# Altium PCB MCU.PcbDoc
Units mm, origin at the board's own origin, x right, y up, seen from the top; angles counter-clockwise.
Board outline 47.6 x 56 mm, 2 copper layers (Top Layer, Bottom Layer); 17 components, 32 nets, 141 pads, 12 vias.
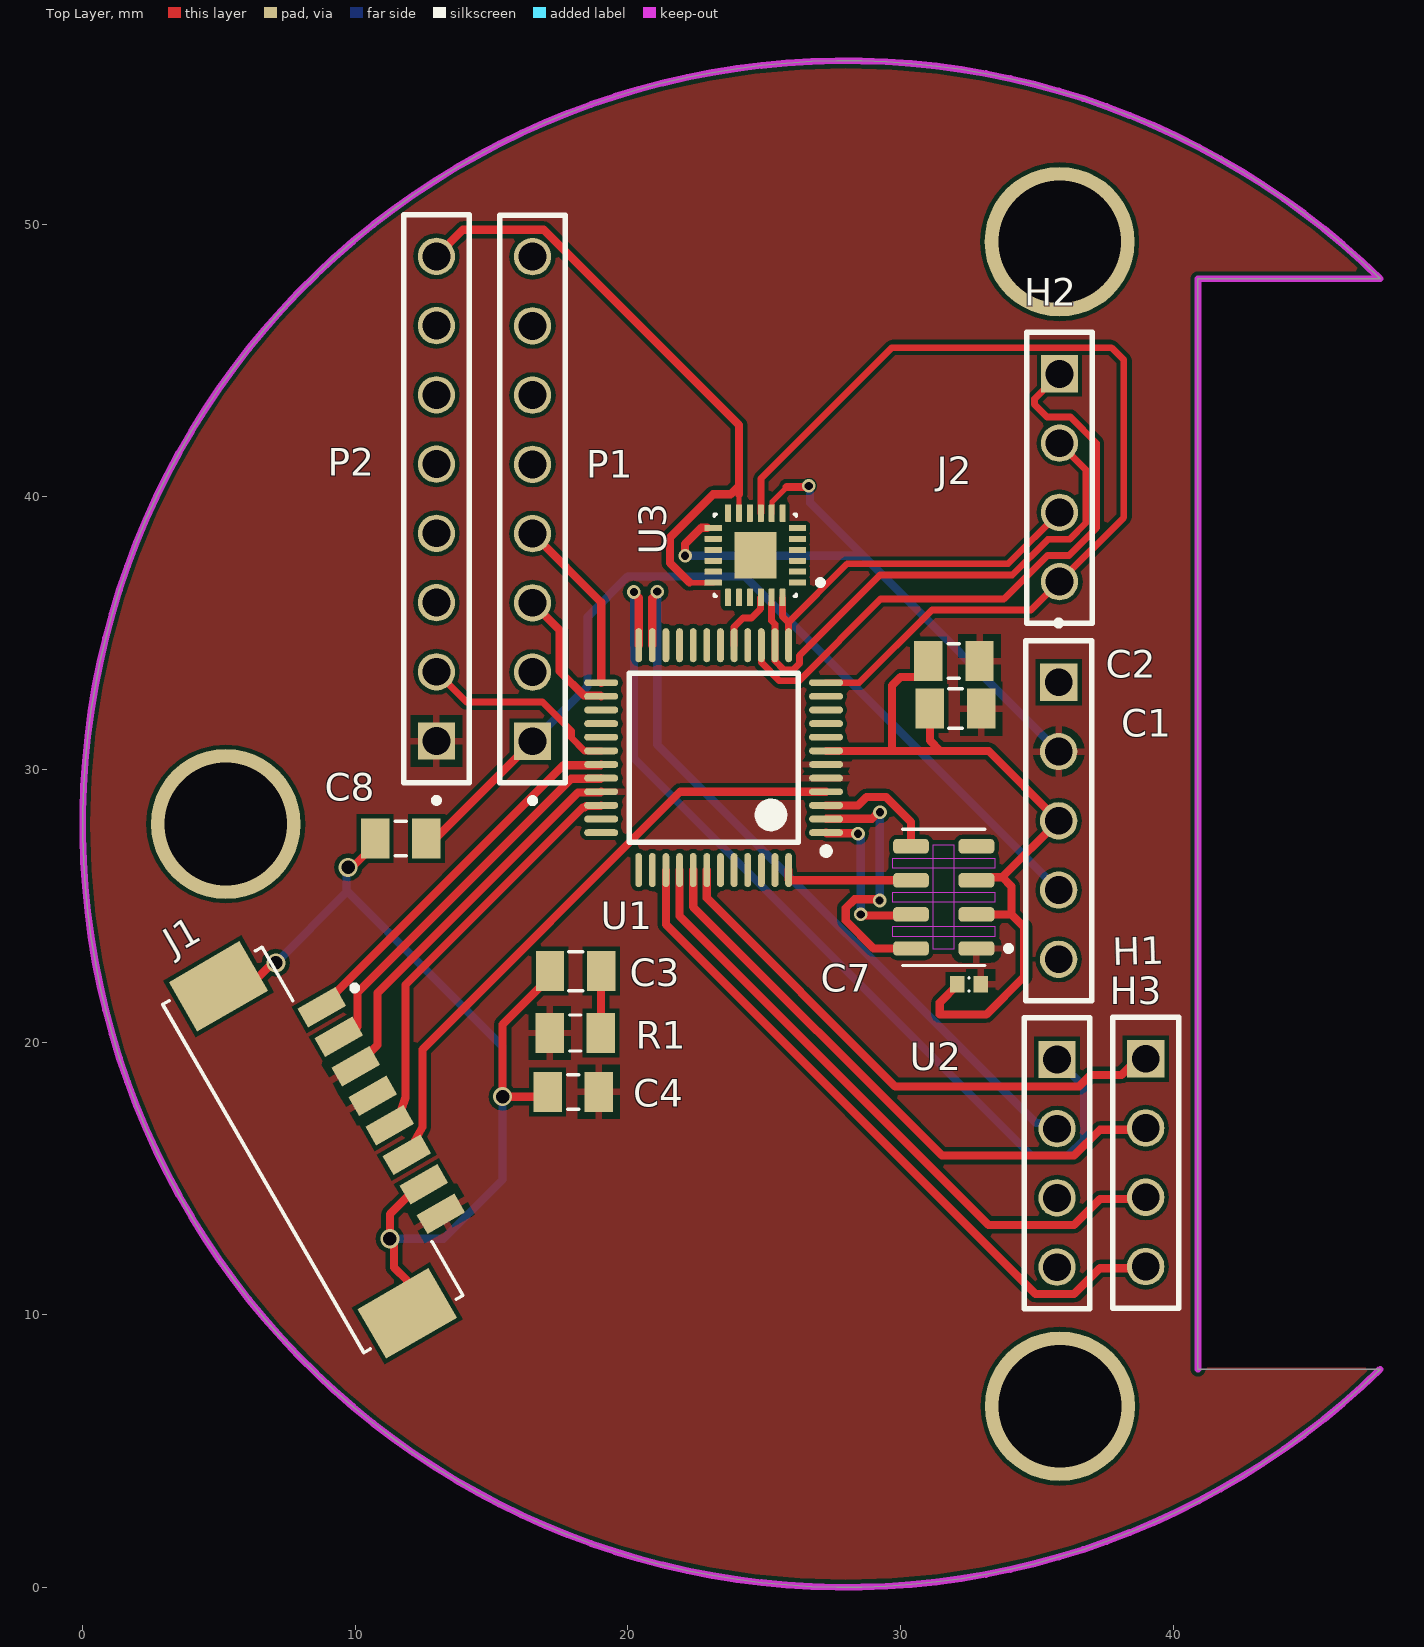
[diagram p0: Top Layer view]
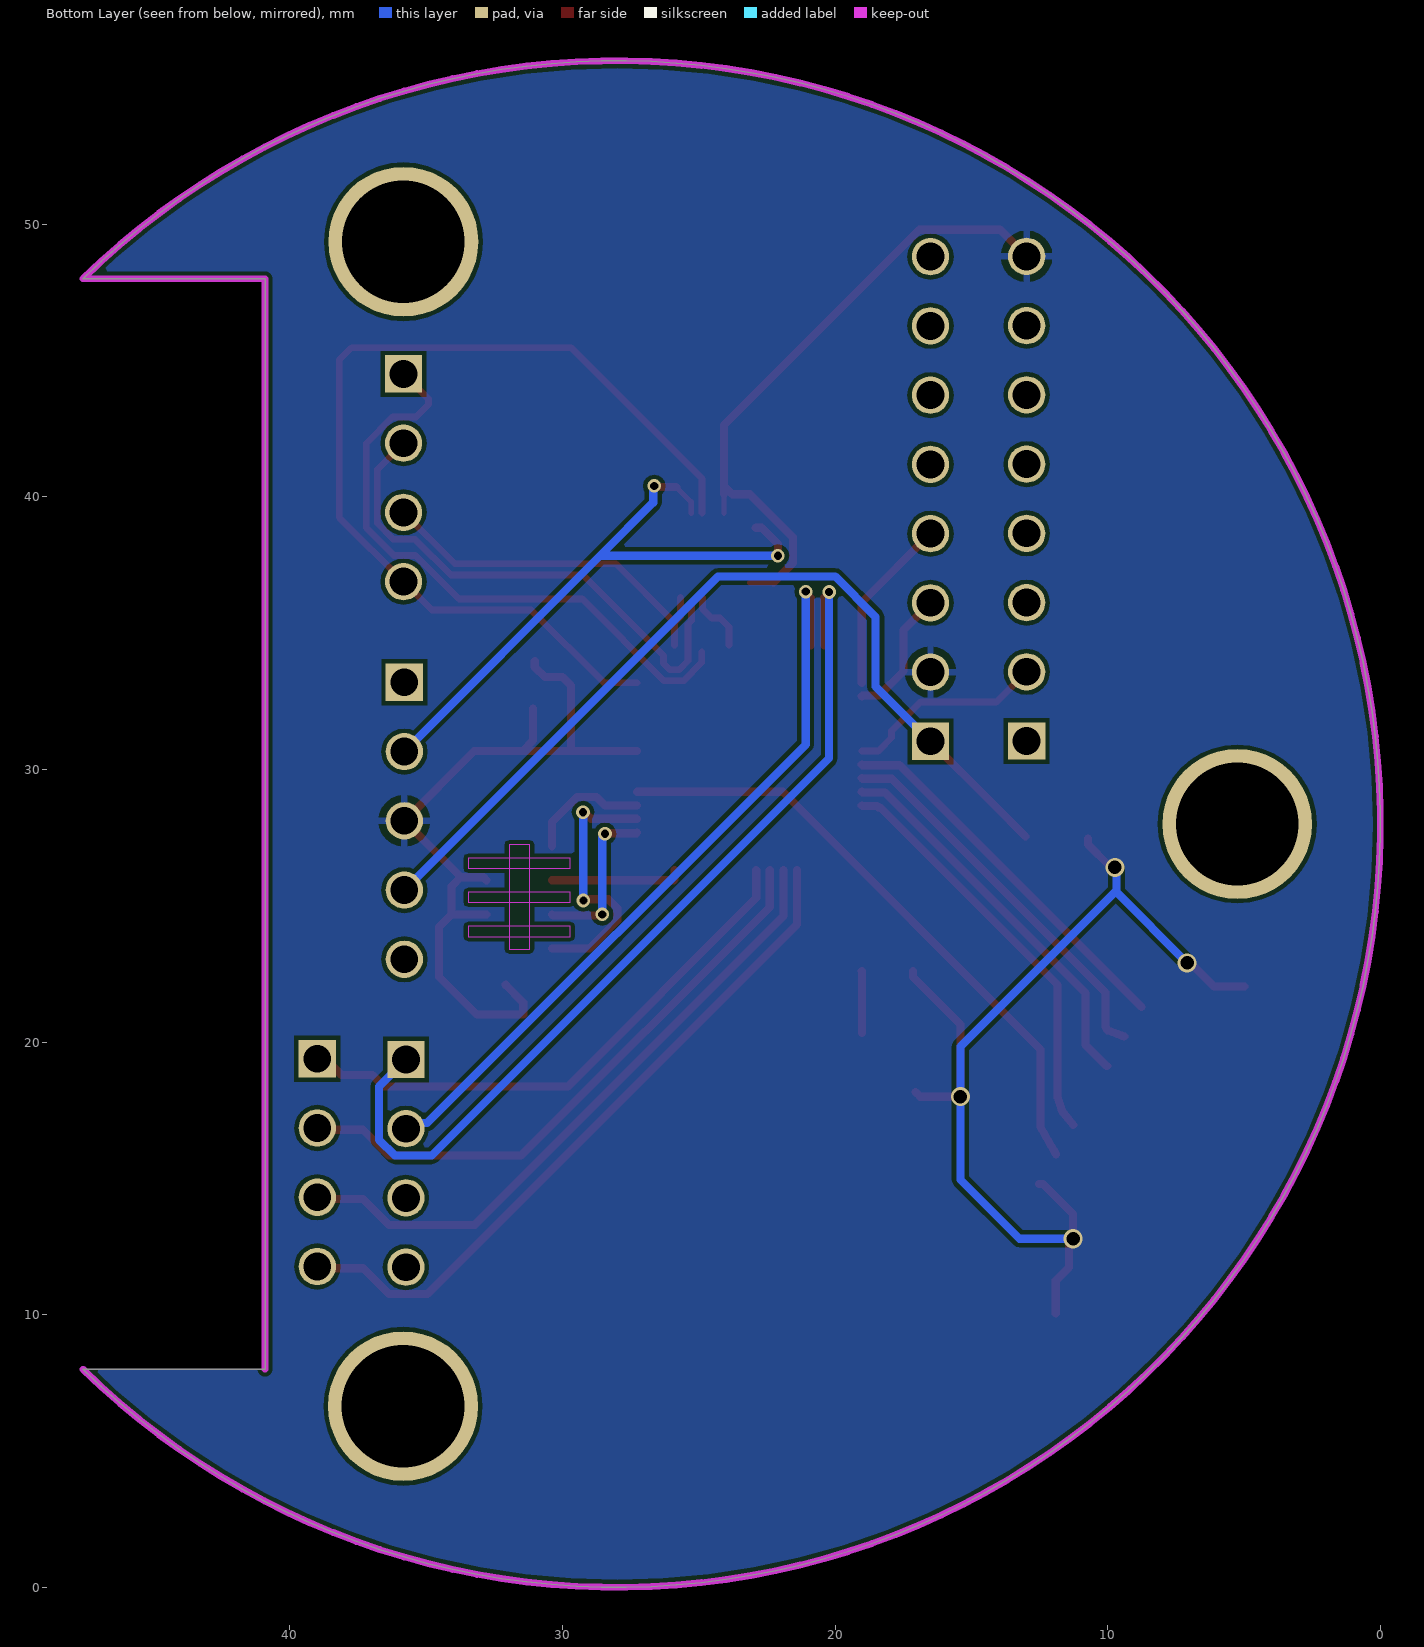
[diagram p1: Bottom Layer view, seen from below]
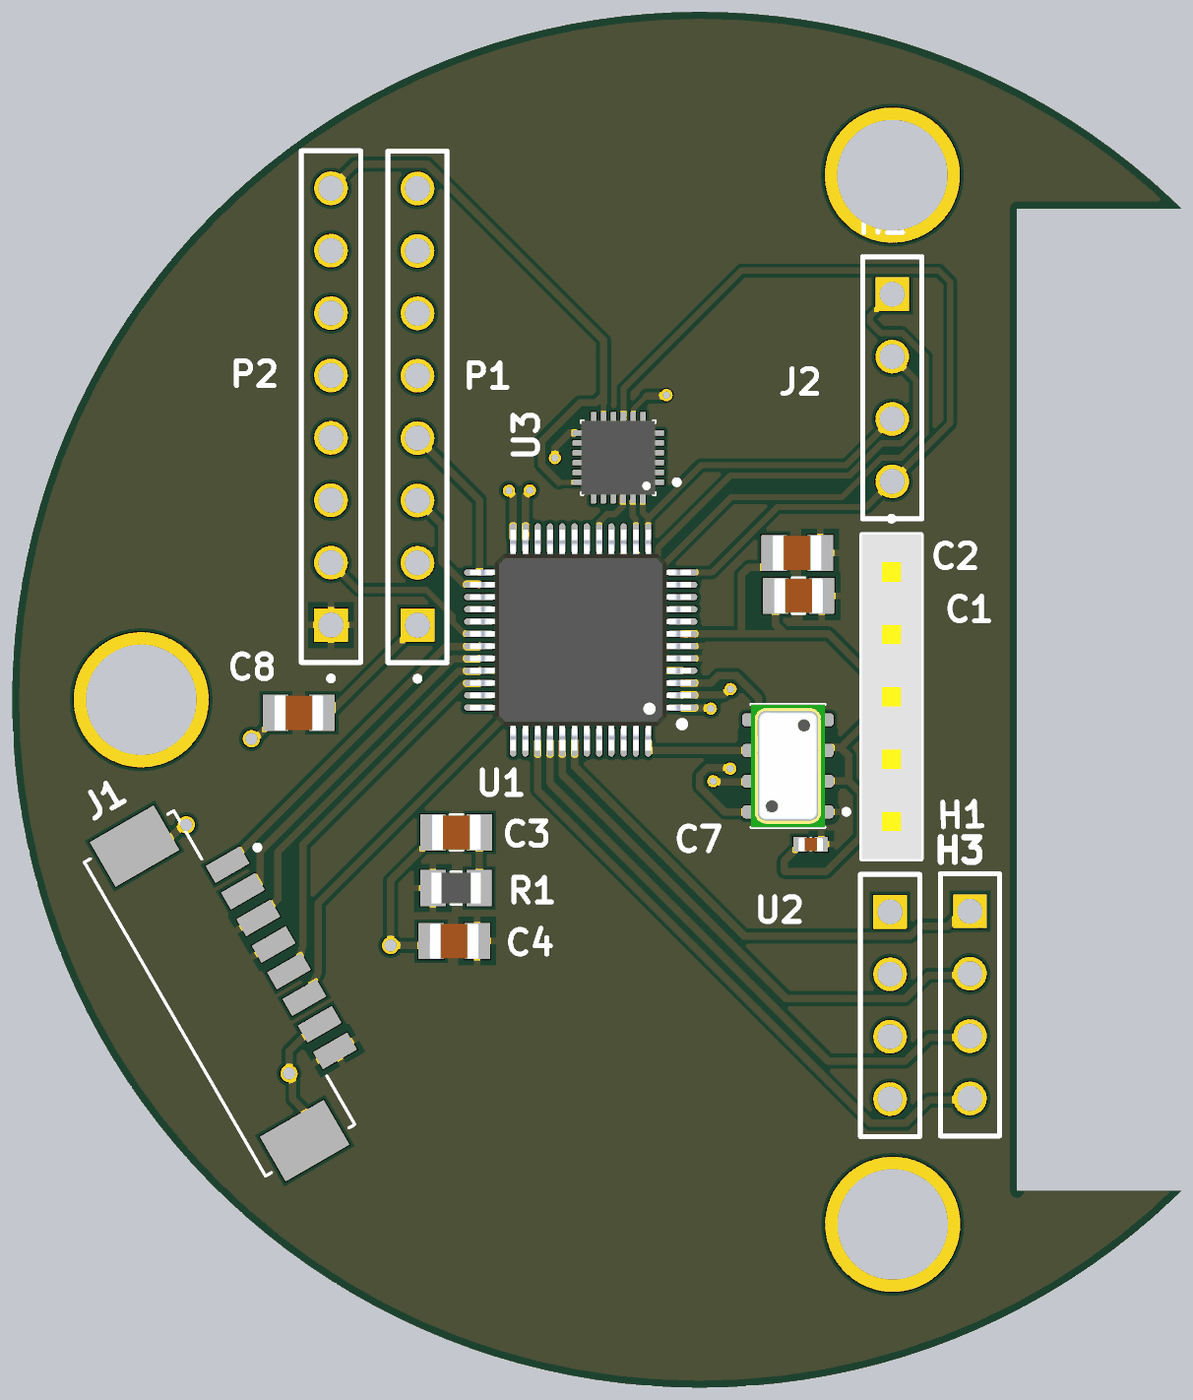
[diagram p2: 3D render of the assembled board from above, using the file's embedded part models]

## Layer stack, top to bottom
Top Solder: solder mask 0.0102, Solder Resist, Dk 3.5
Top Layer: signal copper 0.0356
Dielectric 1: dielectric 0.32, FR-4, Dk 4.8
Bottom Layer: signal copper 0.0356
Bottom Solder: solder mask 0.0102, Solder Resist, Dk 3.5

## Board outline
47.596,8 cw(c28,28) 47.596,48 47.6,48 40.913,48 40.913,8

## Design rules (kind name [scope] priority, off if disabled: settings)
Clearance [All] p1: gap=0.152 ignorepadtopadclearanceinfootprint=FALSE
HoleSize [All] p1: absolutevalues=TRUE maxlimit=6.2 minlimit=0.3 maxpercent=80.000 minpercent=20.000
MinimumAnnularRing [All] p1: minimumring=0.15
MinimumSolderMaskSliver [All] p1: minsoldermaskwidth=0.1
PolygonConnect ViaConnect [IsVia] p1: connectstyle=Direct reliefconductorwidth=0.254 reliefentries=4 polygonreliefangle="90 Angle" airgapwidth=0.254
PolygonConnect [All] p2: connectstyle=Relief reliefconductorwidth=0.254 reliefentries=4 polygonreliefangle="90 Angle" airgapwidth=0.254
RoutingVias [All] p1: holewidth=0.3 width=0.6 viastyle="Through Hole" minholewidth=0.3 minwidth=0.5 maxholewidth=1 maxwidth=5
SilkToSilkClearance [All] p1: silktosilkclearance=0.1
SilkToSolderMaskClearance [IsPad] p1: minsilkscreentomaskgap=0.1 clearancetoexposedcopper=TRUE
SolderMaskExpansion [All] p1: expansion=0.051 istentingtop=FALSE
SupplyNets "Schematic Supply Nets" [InNet('GND')] p1: voltage=0.000
SupplyNets "Schematic Supply Nets_5" [InNet('3V3')] p2: voltage=0.000
Width [All] p1: maxlimit=25.4 minlimit=0.15 preferedwidth=0.3
26 further rules are at their usual default settings.

## Components (designator, comment, footprint, x,y, rotation, side; value= is the part's Value field where it differs from the comment)
C1 "100nF" CAPACITOR_0805_2012M-70N 32.019,32.234 r0 top
C2 "22uF" CAPACITOR_0805_2012M-70N 31.961,33.977 r0 top
C3 "22uF" CAPACITOR_0805_2012M-70N 18.085,22.602 r0 top
C4 "22uF" CAPACITOR_0805_2012M-70N 17.997,18.174 r0 top
C7 "100nf" CAPACITOR_0402_1005M_55N 32.512,22.116 r0 top
C8 "22uF" CAPACITOR_0805_2012M-70N 11.667,27.466 r0 top
H1 "SSQ-104-02-S-S" *SAMTEC_SSQ-104-02-S-S_SSQ-104-02-S-S(Primary) 35.744,15.554 r270 top
H2 "SSQ-104-02-S-S" *SAMTEC_SSQ-104-02-S-S_SSQ-104-02-S-S(Primary) 35.833,40.7 r270 top
H3 "SSQ-104-02-S-S" *SAMTEC_SSQ-104-02-S-S_SSQ-104-02-S-S(Primary) 38.996,15.578 r270 top
J1 "0532610871" MOLEX_0532610871 8.444,16.046 r300 top
J2 "SSQ-105-03-S-S" SAMTEC_SSQ-105-03-S-S 35.803,28.118 r270 top
P1 "SSQ-108-01-F-S-LL" *SAMTEC_SSQ-108-01-F-S-LL_SSQ-108-01-F-S-LL(Primary) 16.502,39.923 r90 top
P2 "SSQ-108-01-F-S-LL" *SAMTEC_SSQ-108-01-F-S-LL_SSQ-108-01-F-S-LL(Primary) 12.978,39.932 r90 top
R1 "*" Resistor_0805_2012M-50N 18.071,20.334 r180 top
U1 "MSP430FR2355TPT" PT0048A_L 23.147,30.433 r180 top
U2 "MS5611-01BA03" SON125P500X300X100-8N 31.586,25.309 r180 top
U3 "" QFN40P300X300X95-25N 24.677,37.857 r180 top

## Footprints (in the part's own frame and the unit in brackets; to place one, negate y for a bottom-side part, rotate by r counter-clockwise, add the part's x,y. Pads: shape width x height; smd on the part's side, far side on the other; paste and mask are expansions set on the pad)
*SAMTEC_SSQ-104-02-S-S_SSQ-104-02-S-S(Primary) [mm]
  rect 1.37x1.37 hole 1.02: 01(-3.81,0)
  round 1.37 hole 1.02: 02(-1.27,0) 03(1.27,0) 04(3.81,0)
  silkscreen extent -5.34,-1.21 5.34,1.21
*SAMTEC_SSQ-108-01-F-S-LL_SSQ-108-01-F-S-LL(Primary) [mm]
  rect 1.37x1.37 hole 1.02: 01(-8.89,0)
  round 1.37 hole 1.02: 02(-6.35,0) 03(-3.81,0) 04(-1.27,0) 05(1.27,0) 06(3.81,0) 07(6.35,0) 08(8.89,0)
  silkscreen extent -11.16,-1.21 10.42,1.21
CAPACITOR_0402_1005M_55N [mm] "Capacitor, 0402 (1005 metric), 0.55mm height, nominal pads"
  rect 0.54x0.6 smd mask+0.051: 1(-0.432,0) 2(0.432,0)
  silkscreen extent 0,-0.25 0,0.25, body extent -0.5,-0.28 0.5,0.27, height 0.48
CAPACITOR_0805_2012M-70N [mm] "Capacitor, 0805 (2012 metric), 0.7mm high, nominal pads,"
  rect 1.04x1.47 smd mask+0.051: 1(-0.94,0) 2(0.94,0)
  silkscreen extent -0.25,-0.72 0.25,0.72, body extent -1,-0.73 1,0.73, height 1.23
MOLEX_0532610871 [mm]
  rect 0.8x1.6 smd: 1(-4.375,2.9) 2(-3.125,2.9) 3(-1.875,2.9) 4(-0.625,2.9) 5(0.625,2.9) 6(1.875,2.9) 7(3.125,2.9) 8(4.375,2.9)
  rect 2.1x3 smd: S1(-6.925,0) S2(6.925,0)
  silkscreen extent -7.37,-2.1 7.37,4.4
PT0048A_L [mm]
  oval 1.25x0.25 smd paste+0 mask+0.051: 1(-4.125,2.75) 2(-4.125,2.25) 3(-4.125,1.75) 4(-4.125,1.25) 5(-4.125,0.75) 6(-4.125,0.25) 7(-4.125,-0.25) 8(-4.125,-0.75) 9(-4.125,-1.25) 10(-4.125,-1.75) 11(-4.125,-2.25) 12(-4.125,-2.75) 25(4.125,-2.75) 26(4.125,-2.25) 27(4.125,-1.75) 28(4.125,-1.25) 29(4.125,-0.75) 30(4.125,-0.25) 31(4.125,0.25) 32(4.125,0.75) 33(4.125,1.25) 34(4.125,1.75) 35(4.125,2.25) 36(4.125,2.75)
  oval 0.25x1.25 smd paste+0 mask+0.051: 13(-2.75,-4.125) 14(-2.25,-4.125) 15(-1.75,-4.125) 16(-1.25,-4.125) 17(-0.75,-4.125) 18(-0.25,-4.125) 19(0.25,-4.125) 20(0.75,-4.125) 21(1.25,-4.125) 22(1.75,-4.125) 23(2.25,-4.125) 24(2.75,-4.125) 37(2.75,4.125) 38(2.25,4.125) 39(1.75,4.125) 40(1.25,4.125) 41(0.75,4.125) 42(0.25,4.125) 43(-0.25,4.125) 44(-0.75,4.125) 45(-1.25,4.125) 46(-1.75,4.125) 47(-2.25,4.125) 48(-2.75,4.125)
  silkscreen extent -4.25,-3.1 3.1,3.55, body extent -4.5,-4.5 4.5,4.5, height 1.6
QFN40P300X300X95-25N [mm]
  rrect25% 0.64x0.22 smd: 1(-1.545,1) 2(-1.545,0.6) 3(-1.545,0.2) 4(-1.545,-0.2) 5(-1.545,-0.6) 6(-1.545,-1) 13(1.545,-1) 14(1.545,-0.6) 15(1.545,-0.2) 16(1.545,0.2) 17(1.545,0.6) 18(1.545,1)
  rrect25% 0.22x0.64 smd: 7(-1,-1.545) 8(-0.6,-1.545) 9(-0.2,-1.545) 10(0.2,-1.545) 11(0.6,-1.545) 12(1,-1.545) 19(1,1.545) 20(0.6,1.545) 21(0.2,1.545) 22(-0.2,1.545) 23(-0.6,1.545) 24(-1,1.545)
  rect 1.54x1.7 smd paste-2: 25(0,0)
  silkscreen extent -2.48,-1.5 1.5,1.5, body extent -1.5,-1.5 1.5,1.5, height 0.95
Resistor_0805_2012M-50N [mm] "Resistor, 0805 (2012 metric), nominal pads"
  rect 1.04x1.47 smd mask+0.051: 1(-0.94,0) 2(0.94,0)
  silkscreen extent -0.2,-0.66 0.2,0.66, body extent -1,-0.63 1,0.62, height 0.5
SAMTEC_SSQ-105-03-S-S [mm]
  rect 1.37x1.37 / inner round 1.37 / far side rect 1.37x1.37 hole 1.02: 1(-5.08,0)
  round 1.37 hole 1.02: 2(-2.54,0) 3(0,0) 4(2.54,0) 5(5.08,0)
  silkscreen extent -7.35,-1.21 6.61,1.21, body extent -6.6,-1.21 6.6,1.21, height 8.51
SON125P500X300X100-8N [mm]
  rrect50% 1.31x0.53 smd: 1(-1.2,1.875) 2(-1.2,0.625) 3(-1.2,-0.625) 4(-1.2,-1.875) 5(1.2,-1.875) 6(1.2,-0.625) 7(1.2,0.625) 8(1.2,1.875)
  Keep-Out Layer region: 1.875,1.064 -1.878,1.064 -1.878,1.438 1.875,1.438
  Keep-Out Layer region: 1.875,-0.188 -1.878,-0.188 -1.878,0.188 1.875,0.188
  Keep-Out Layer region: 1.875,-1.44 -1.878,-1.44 -1.878,-1.062 1.875,-1.062
  Keep-Out Layer region: 0.381,-1.935 -0.375,-1.935 -0.375,1.905 0.381,1.905
  Keep-Out Layer region: 0.381,-1.935 -0.375,-1.935 -0.375,1.905 0.381,1.905
  Keep-Out Layer region: 1.875,1.063 -1.875,1.063 -1.875,1.438 1.875,1.438
  Keep-Out Layer region: 0.381,-1.935 -0.375,-1.935 -0.375,1.905 0.381,1.905
  Keep-Out Layer region: 1.875,-0.188 -1.878,-0.188 -1.878,0.188 1.875,0.188
  Keep-Out Layer region: 1.875,-1.44 -1.878,-1.44 -1.878,-1.062 1.875,-1.062
  silkscreen extent -2.48,-2.5 1.5,2.5, body extent -1.5,-2.5 1.5,2.5, height 1.1

## Part data
C1: library part "Generic Capacitor", "Generic Capacitor", Capacitance at Rated Voltage=40%, MF Part No.=C0805C104K5RAC7800, Package=0805, Rated Voltage=50V, Supplier 1 Part No.=399-C0805C104K5RAC7800CT-ND, Temp Range="-55°C ~ 125°C", Temperature Coefficient=X7R, Tolerance=±10%, Supplier 1=Digikey
C2 C3 C4 C8: library part C0805C226M9PACTU, "Passive - Capacitor, X5R, 22uF Max, 6.3V, 0805 (2012 Metric), ±20%, -55°C ~ 85°C. 8.8uF @ 5V", Capacitance at Rated Voltage=30%, Package=0805, Rated Voltage=6.3V, Supplier 1 Part No.=399-C0805C226M9PAC7800CT-ND, Temp Range="-55°C ~ 85°C", Temperature Coefficient=X5R, Tolerance=±20%, APSS Standard Part="APSS Standard", MF Part No.=C0805C226M9PACTU, Supplier 1=Digikey
C7: library part "GCM1555CxxxxxF Series", "Passive - Capacitor Series, C0G, 5pF ~ 1nF, 50V, 0402 (1005 Metric), ±1%, -55°C ~ 125°C", Capacitance at Rated Voltage=100%, Package=0402, Rated Voltage=50V, Temp Range="-55°C ~ 125°C", Temperature Coefficient=C0G, Tolerance=±1%, Value Range="5pF ~ 1nF", APSS Standard Part="APSS Standard", E Series=E24, Supplier 1=Digikey
J1: "Picoblade Connector, 8 Circuit Single Row, Right Angle Surface Mount SMT PCB", Package=None, Availability="In Stock", Check_prices=https://www.snapeda.com/parts/0532610871/Molex/view-part/?ref=eda, MF=Molex, MP=0532610871, Price=None, Purchase-URL=https://pricing.snapeda.com/search/part/0532610871/?ref=eda, SnapEDA_Link=https://www.snapeda.com/parts/0532610871/Molex/view-part/?ref=snap
J2: Package=None, Availability=Unavailable, MF="{'manufacturer': u'Samtec Inc.'}", MP=SSQ-105-03-S-S, Price=None
R1: library part "RMCF0805JT Series", "Passive - Resistor Series, 0805, 5%, 100m - 22M, E24, 0.063W, 1/16W, ±200ppm/°C, -55°C ~ 155°C, 0805 (2012 Metric)", Package=0805, Power=1/8W, Rated Voltage=150V, Temp Range="-55°C ~ 155°C", Temperature Coefficient=±200ppm/°C, Tolerance=5%, Value Range="100m ~ 22M", APSS Standard Part="APSS Standard", E Series=E24, Supplier 1=Digikey
U1: library part MSP430FR2355IPT, Package=LQFP-48, Rated Voltage="1.8V ~ 3.6V", Supplier 1 Part No.=296-50260-ND, Temp Range="-40°C ~ 105°C (TA)", APSS Standard Part="APSS Standard", MF Part No.=MSP430FR2355TPT, Supplier 1=Digikey
U2: "Pressure Sensor 0.15PSI ~ 17.4PSI (1kPa ~ 120kPa) Absolute - 24 b 8-SMD", Package="SMD-8 Measurement Specialties", Availability="Not in stock", Check_prices=https://www.snapeda.com/parts/MS5611-01BA03/TE+Connectivity+ALCOSWITCH+Switches/view-part/?ref=eda, MF="TE Connectivity", MP=MS5611-01BA03, Price=None, SnapEDA_Link=https://www.snapeda.com/parts/MS5611-01BA03/TE+Connectivity+ALCOSWITCH+Switches/view-part/?ref=snap
U3: library part MPU-6500, "MotionTracking Device Digital Output 1.8V 24-Pin QFN EP T/R", Package="QFN-24 TDK", Check_prices=https://www.snapeda.com/parts/MPU-6500/TDK/view-part/?ref=eda, MF="TDK InvenSense", MP=MPU-6500, SnapEDA_Link=https://www.snapeda.com/parts/MPU-6500/TDK/view-part/?ref=snap
P1 P2: Check_prices=https://www.snapeda.com/parts/SSQ-108-01-F-S-LL/Samtec/view-part/?ref=eda, SnapEDA_Link=https://www.snapeda.com/parts/SSQ-108-01-F-S-LL/Samtec/view-part/?ref=snap

## Free pads (board coordinates)
  round 5.5 hole 4.5: 1(5.25,28) 1(35.837,49.357) 1(35.851,6.643)

## Via types
v1: diameter 0.5, hole 0.3, Top Layer to Bottom Layer, 8 vias
v2: diameter 0.7, hole 0.5, Top Layer to Bottom Layer, 4 vias

## Nets (pads, with @x,y where several pads share a name; then routed paths per layer and width w, separated by ;. In a path a pad name is that pad's centre, name@x,y a point inside that pad or via, vN(x,y) a via of type N, cw(c..) or ccw(c..) an arc to the next point about the centre after c; other vN are vias at no path point)
1V8: J2.1
3V3: C1.2 C2.2 C4.2 C7.2 J1.3 J1.4 J1.8 J2.2 P2.01 R1.2 U1.5 U1.6 U1.33 U2.1 U3.8 U3.13 | length 37.9
  Top Layer w0.2: U3.8 25.287,39.412 25.287,39.819 25.831,40.363
  Top Layer w0.3: J1.3 10.049,19.12 10.821,19.892 10.821,21.808 18.171,29.158 18.997,29.158 U1.33 ; v1(22.1,37.843) 22.1,38.266 22.703,38.869 U3.13@22.912,38.869 ; 25.831,40.363 26.599,40.363 v1(26.637,40.402)
  Bottom Layer w0.3: v1(22.1,37.843) 28.618,37.843 ; v1(26.637,40.402) 26.675,40.363 26.675,39.786 28.618,37.843 ; J2.2 28.618,37.843
5V: C8.2 J2.4 P1.01 | length 33
  Top Layer w0.3: C8.2@13.016,27.547 14.201,28.732 P1.01
  Bottom Layer w0.3: P1.01 18.515,33.046 18.515,35.6 19.994,37.078 24.303,37.078 J2.4
BTCRL0: H1.03
BTCRL1: H1.04
Buzz_GPIO: H3.04 U1.39 | length 25.2
  Top Layer w0.3: U1.39 21.397,24.315 34.956,10.756 36.369,10.756 37.318,11.705 H3.04@38.641,11.705
ESP_GPIO16: P2.02 U1.30 | length 7.4
  Top Layer w0.25: P2.02 14.086,32.473 16.864,32.473 17.929,31.407 17.929,31.164 18.41,30.683 U1.30
GND: C1.1 C2.1 C3.1 C4.1 C7.1 C8.1 J1.7 J1.S1 J1.S2 J2.3 P1.02 P2.08 U1.7 U2.2 U2.3 U3.11 U3.18 | length 92.8
  Top Layer w0.2: 22.267,36.857 U3.18 ; U3.11 24.077,40.095
  Top Layer w0.3: J1.S1 6.108,22.043 6.896,22.831 7.011,22.831 v2(7.087,22.908) ; v2(9.738,26.411) 9.814,26.487 9.964,26.487 10.727,27.251 C8.1 ; J1.S2 11.907,11.252 11.424,11.734 11.424,12.522 11.269,12.677 11.269,13.688 12.372,14.79 J1.7 ; P2.08 13.956,49.8 16.911,49.8 24.077,42.635 24.077,40.402 ; C4.1 16.879,17.997 v2(15.406,17.997) 15.406,20.648 17.145,22.387 C3.1 ; 22.267,36.857 21.547,37.576 21.547,38.516 23.126,40.095 23.77,40.095 24.077,40.402 ; 24.077,40.095 24.077,40.402 ; U1.7 29.669,30.683 ; C2.1 31.021,33.762 30.651,33.392 30,33.392 29.687,33.08 29.687,30.701 29.669,30.683 ; C1.1 31.079,31.057 31.454,30.683 ; C7.1 32.08,22.086 31.443,21.448 31.443,21.011 33.148,21.011 34.533,22.396 34.533,24.219 34.068,24.684 ; U2.2 34.068,24.684 ; U2.3 32.901,26.049 33.734,26.049 ; 29.669,30.683 31.454,30.683 ; 31.454,30.683 33.238,30.683 J2.3 33.734,26.049 ; 33.734,26.049 34.068,25.715 34.068,24.684
  Bottom Layer w0.3: v2(7.087,22.908) 9.682,25.503 9.682,26.355 v2(9.738,26.411) ; 9.738,25.503 15.406,19.835 v2(15.406,17.997) 15.406,14.951 13.24,12.785 v2(11.269,12.785)
GPIO1: H3.01 U1.42 | length 20
  Top Layer w0.3: U1.42 22.897,25.286 29.807,18.376 36.554,18.376 36.968,18.79 38.106,18.79 H3.01@38.641,19.325
GPIO2: H3.02 U1.41 | length 21.8
  Top Layer w0.3: U1.41 22.397,24.963 31.523,15.836 36.369,15.836 37.318,16.785 H3.02@38.641,16.785
GPIO3: H3.03 U1.40 | length 23.5
  Top Layer w0.3: U1.40 21.897,24.623 33.223,13.296 36.369,13.296 37.318,14.245 H3.03@38.641,14.245
GPIO4: P1.03 U1.26 | length 4.8
  Top Layer w0.3: P1.03 17.496,35.119 17.496,33.604 18.392,32.708 18.997,32.708 U1.26
GPIO5: P1.04 U1.25 | length 6.5
  Top Layer w0.3: P1.04 19.022,36.133 U1.25
GPS_UART_RX_stack: H1.01 U1.24 | length 34.3
  Top Layer w0.3: v1(20.222,36.511) 20.222,36.471 20.397,36.297 U1.24
  Bottom Layer w0.3: v1(20.222,36.511) 20.222,30.412 27.54,23.094 34.798,15.836 36.153,15.836 36.731,16.415 36.731,18.376 H1.01
GPS_UART_TX_stack: H1.02 U1.23 | length 28.2
  Top Layer w0.3: U1.23 20.897,36.292 21.076,36.471 v1(21.076,36.526)
  Bottom Layer w0.3: v1(21.076,36.526) 21.076,30.918 34.965,17.028 35.539,17.028 H1.02
JTAG_TEST/SBW_TCK: J1.6 U1.4 | length 22.7
  Top Layer w0.3: J1.6 12.134,16.3 12.463,16.883 12.463,19.726 21.92,29.183 U1.4
MPU_NCS: U1.17 U3.22 | length 2.3
  Top Layer w0.25: U1.17 23.897,35.231 24.224,35.559 24.53,35.559 24.864,35.893 24.864,36.299 U3.22
MS5611_CSB: U1.3 U2.5 | length 4.5
  Top Layer w0.3: U1.3 28.448,28.683 28.751,28.986 29.476,28.986 30.386,28.076 U2.5
NetC3_2: C3.2 R1.1 | length 2.3
  Top Layer w0.3: R1.1 19.011,22.588 C3.2
U0_RXD: P2.06
U0_TXD: P2.07
UCA0_RX/MISO/JTAG_TDI: J1.2 U1.32 | length 14.3
  Top Layer w0.3: J1.2 10.009,20.436 10.083,20.567 10.083,21.823 17.918,29.658 18.997,29.658 U1.32
UCA0_STE/JTAG_TCK: J1.5 U1.34 | length 15.2
  Top Layer w0.3: J1.5 11.683,17.483 11.838,17.965 11.838,18.172 11.838,22.104 18.345,28.61 18.416,28.61 18.464,28.658 18.997,28.658 U1.34
UCA0_TX/MOSI/JTAG_TDO: J1.1 U1.31 | length 13.9
  Top Layer w0.3: J1.1 17.641,30.158 18.997,30.158 U1.31
UCB0_CLK: U1.2 U2.8 | length 10
  Top Layer w0.3: U1.2 27.282,28.193 28.953,28.193 29.193,28.434 v1(29.248,28.434) ; v1(29.236,25.196) 29.181,25.196 29.14,25.238 28.316,25.238 27.992,24.914 27.992,24.457 29.015,23.434 U2.8
  Bottom Layer w0.3: v1(29.236,25.196) 29.242,25.202 29.242,28.428 v1(29.248,28.434)
UCB0_SCL/MISO: U1.48 U2.6 | length 4.8
  Top Layer w0.3: U1.48 25.897,25.959 25.922,25.934 U2.6
UCB0_SDA/MOSI: U1.1 U2.7 | length 6.1
  Top Layer w0.3: U1.1 27.293,27.662 28.422,27.662 v1(28.443,27.641) ; v1(28.545,24.686) 28.599,24.686 28.641,24.644 30.346,24.644 U2.7
  Bottom Layer w0.3: v1(28.443,27.641) 28.443,27.587 28.545,27.484 v1(28.545,24.686)
UCB1_CLK: H2.02 U1.14 U3.23 | length 19.4
  Top Layer w0.25: U3.23@25.267,36.106 25.267,35.458 25.397,35.327 U1.14 25.397,33.989 25.73,33.656 26.063,33.656 26.299,33.891 26.299,34.175 29.253,37.128 34.1,37.128 35.413,38.442 36.205,38.442 36.795,39.032 36.795,41.008 H2.02
UCB1_MISO/SCL: H2.04 U1.12 U3.9 | length 36
  Top Layer w0.25: U3.9 24.889,39.414 24.889,40.669 29.694,45.473 37.734,45.473 38.192,45.015 38.192,39.25 H2.04 34.791,35.849 31.153,35.849 28.487,33.183 U1.12
UCB1_MOSI/SDA: H2.03 U1.13 U3.24 | length 13.5
  Top Layer w0.25: U3.24 25.677,35.617 25.897,35.397 ; U1.13 25.897,35.397 ; H2.03 33.948,37.546 28.046,37.546 25.897,35.397
UCB1_STE: H2.01 U1.15 | length 22.8
  Top Layer w0.25: U1.15@24.897,34.308 24.897,33.92 25.563,33.253 26.273,33.253 29.271,36.251 33.791,36.251 35.393,37.853 36.185,37.853 37.197,38.865 37.197,41.967 36.231,42.933 35.376,42.933 34.919,43.39 34.919,43.597 H2.01
Vbat: J2.5
pads on no net: P1.05 P1.06 P1.07 P1.08 P2.03 P2.04 P2.05 U1.8 U1.9 U1.10 U1.11 U1.16 U1.18 U1.19 U1.20 U1.21 U1.22 U1.27 U1.28 U1.29 U1.35 U1.36 U1.37 U1.38 U1.43 U1.44 U1.45 U1.46 U1.47 U2.4 U3.1 U3.2 U3.3 U3.4 U3.5 U3.6 U3.7 U3.10 U3.12 U3.14 U3.15 U3.16 U3.17 U3.19 U3.20 U3.21 U3.25

## Polygon pours and split planes (outlines as drawn)
3V3 on Top Layer "3V3" (solid, pour order 9): 47.596,8.057 cw(c28,28.057) 47.596,48.057 47.6,48.057 40.913,48.057 40.913,8.057
GND on Bottom Layer "Bottom GND" (solid, pour order 6): 47.596,8 cw(c28,28) 47.596,48 47.6,48 40.913,48 40.913,8

## Keep-outs
Keep-Out Layer:
  lines w0.25: 40.913,8 40.913,48 47.6,48 47.596,48 ccw(c28,28) 47.596,8

## Silkscreen, mask and mechanical layers (free items; w line width, h text height)
Mechanical 1:
  text "Battery cutout" at 46.172,24.284 h1.52 r90
Mechanical 15:
  lines w0.254: 41.46,9.025 41.46,47.025 49.46,47.025 49.46,9.025